# EAGLE board MOM-analog-ins_v07 (EAGLE 8.1.0)
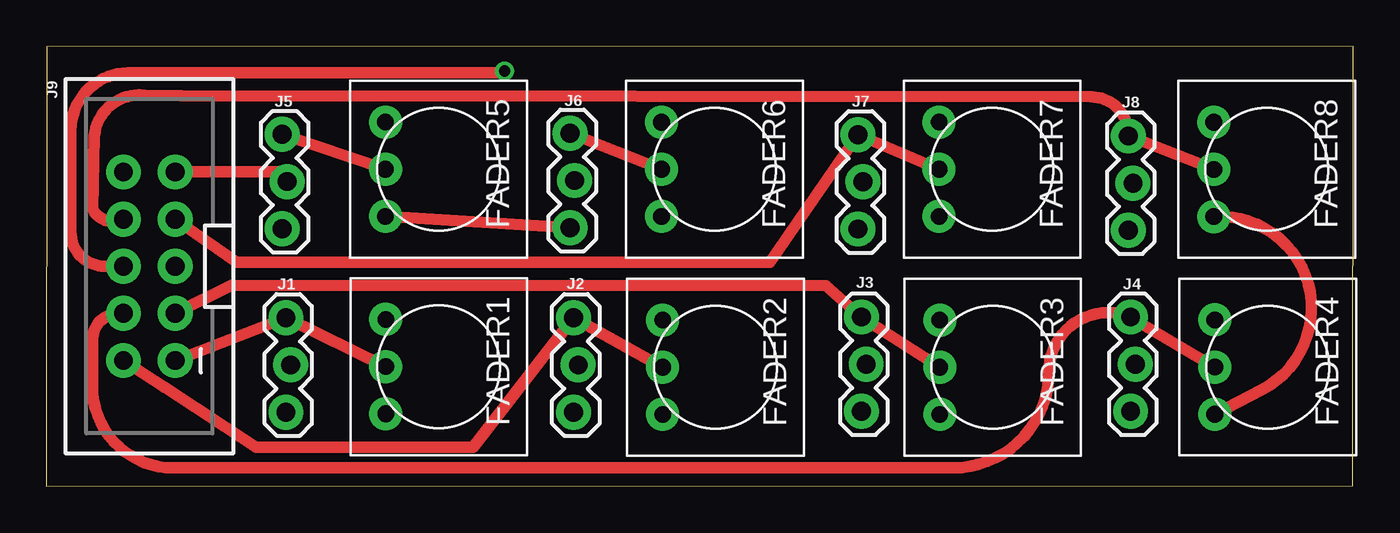
[diagram p0: board, top side]
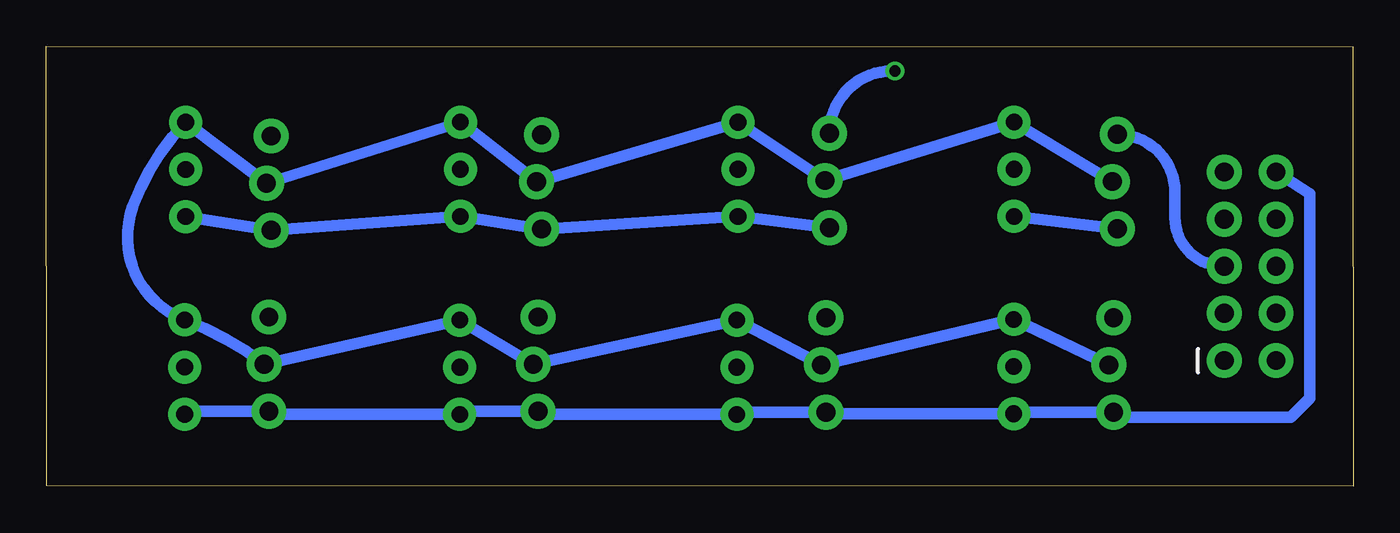
[diagram p1: board, bottom side, seen from below]

Size 70.42 x 23.71 mm. Coordinates in mm from the lower left corner, seen from the top.
Outline: 0.03,23.68 0,0 70.4,0.03 70.42,23.71 0.03,23.68
Copper layers (1*16): Top 0.035mm / dielectric 1.5mm / Bottom 0.035mm
Design rules "default": minimum track width 10mil, minimum drill 24mil, track to track 8mil, track to pad 8mil, pad to pad 8mil, via to via 8mil, smd to smd 8mil, copper to edge 40mil, drill to drill 8mil, minimum pad ring 10mil, minimum via ring 8mil, stop-mask expansion 4mil, vias tented up to drill 0mil, thermal gap 10mil
Net classes: 0 default: width 0.254 mm, clearance 0.152 mm

## Footprints (pad centres in the part's own frame; a part is rotated, then mirrored left to right if it is on the bottom)
TRIM-3386 = drill 0.9 pad 1.778: 1 -2.54,-2.857; 2 0,-2.857; 3 2.54,-2.857
1X03_LOCK = drill 1.016 pad 1.88: 1 0,0.127; 2 2.54,-0.127; 3 5.08,0.127
2X5-SHROUDED_LOCK = drill 1.016 pad 1.88: 1 -1.397,5.08; 2 1.397,5.08; 3 -1.397,2.54; 4 1.397,2.54; 5 -1.397,0; 6 1.397,0; 7 -1.397,-2.54; 8 1.397,-2.54; 9 -1.397,-5.08; 10 1.397,-5.08

## Placement (x,y rotation side)
FADER1  [TRIM-3386]  21.15,6.46 270 top
FADER2  [TRIM-3386]  36.07,6.42 270 top
FADER3  [TRIM-3386]  51,6.42 270 top
FADER4  [TRIM-3386]  65.82,6.43 270 top
FADER5  [TRIM-3386]  21.13,17.09 270 top
FADER6  [TRIM-3386]  36.01,17.09 270 top
FADER7  [TRIM-3386]  50.97,17.09 270 top
FADER8  [TRIM-3386]  65.77,17.08 270 top
J1  [1X03_LOCK]  13.04,4.01 90 top
J2  [1X03_LOCK]  28.54,4.01 90 top
J3  [1X03_LOCK]  44.05,4.05 90 top
J4  [1X03_LOCK]  58.55,4.05 90 top
J5  [1X03_LOCK]  12.84,13.89 90 top
J6  [1X03_LOCK]  28.34,13.95 90 top
J7  [1X03_LOCK]  43.87,13.87 90 top
J8  [1X03_LOCK]  58.44,13.8 90 top
J9  [2X5-SHROUDED_LOCK]  5.55,11.86 180 top

## Library data of the parts
FADER1-FADER8 = adafruit
J1-J8 = SparkFun-Connectors
J9 = SparkFun-Connectors; PROD_ID: CONN-08671; SF_ID: PRT-08506

## Nets
ANALOG1: FADER1.2 J1.3 J9.1
ANALOG2: FADER2.2 J2.3 J9.2
ANALOG3: FADER3.2 J3.3 J9.3
ANALOG4: FADER4.2 J4.3 J9.4
ANALOG5: FADER5.2 J5.3 J9.5
ANALOG6: FADER6.2 J6.3 J9.6
ANALOG7: FADER7.2 J7.3 J9.7
ANALOG8: FADER8.2 J8.3 J9.8
GND: FADER1.3 FADER2.3 FADER3.3 FADER4.3 FADER5.3 FADER6.3 FADER7.3 FADER8.3 J1.1 J2.1 J3.1 J4.1 J5.1 J6.1 J7.1 J8.1 J9.10
VCC: FADER1.1 FADER2.1 FADER3.1 FADER4.1 FADER5.1 FADER6.1 FADER7.1 FADER8.1 J1.2 J2.2 J3.2 J4.2 J5.2 J6.2 J7.2 J8.2 J9.9

## Tracks (layer width: path | path; a pad name or v marks a point on that pad's centre or on a via)
ANALOG1
  Top 0.61: FADER1.2 J1.3 J9.1
ANALOG2
  Top 0.61: FADER2.2 J2.3 22.99,2.11 11.3,2.11 6.37,5.34 6.35,5.34 6.31,5.38 J9.2
ANALOG3
  Top 0.61: FADER3.2 J3.3 42.01,10.83 9.98,10.85 J9.3
ANALOG4
  Top 0.61: FADER4.2 J4.3 arc112 54.03,6.18 arc-90 48.84,1 6.86,1 arc-90 2.49,5.36 2.49,7.9 arc-90 3.91,9.32 J9.4
ANALOG5
  Top 0.61: J5.3 FADER5.2
  Bottom 0.61: J9.5 6.98,11.86 arc90 9.6,14.48 9.6,15.86 arc-90 J5.3
ANALOG6  (via drill 0.6)
  Top 0.61: J6.3 FADER6.2 | J9.6 3.15,11.86 arc-90 1.32,13.7 1.32,19.18 arc-90 4.42,22.28 24.59,22.28 arc90 v24.69,22.38
  Bottom 0.61: v24.69,22.38 24.86,22.38 arc-90 J6.3
ANALOG7
  Top 0.61: FADER7.2 J7.3 38.99,12.07 10.26,12.07 J9.7
ANALOG8
  Top 0.61: FADER8.2 J8.3 arc93 56.31,20.99 7.26,21.06 5.23,21.09 arc90 2.59,18.88 2.49,14.95 arc90 J9.8
GND
  Top 0.61: FADER4.3 65.51,5.21 arc156 FADER8.3 | FADER5.3 J6.1
  Bottom 0.61: J5.1 FADER5.3 | J6.1 FADER6.3 J7.1 FADER7.3 J8.1 FADER8.3 | J9.10 2.34,15.78 2.34,4.75 3.35,3.74 12.64,3.74 J1.1 18.2,4.01 FADER1.3 28.32,3.92 J2.1 33.09,4.01 FADER2.3 43.76,3.88 J3.1 47.98,4.05 FADER3.3 58.26,3.88 J4.1 62.81,4.05 FADER4.3
VCC
  Top 0.61: J9.9 12.45,16.94 arc-90 J5.2
  Bottom 0.61: J5.2 FADER5.1 J6.2 FADER6.1 J7.2 FADER7.1 J8.2 FADER8.1 arc-24 65.76,15.09 arc-90 FADER4.1 arc17 J4.2 FADER3.1 J3.2 FADER2.1 J2.2 FADER1.1 J1.2